# Altium PCB VISUR_SB.PcbDoc
Units mm, origin at the board's own origin, x right, y up, seen from the top; angles counter-clockwise.
Board outline 45 x 60.5 mm, 2 copper layers (Top Layer, Bottom Layer), stack 1.486 mm thick; 1 components, 0 nets, 22 pads, 0 vias.
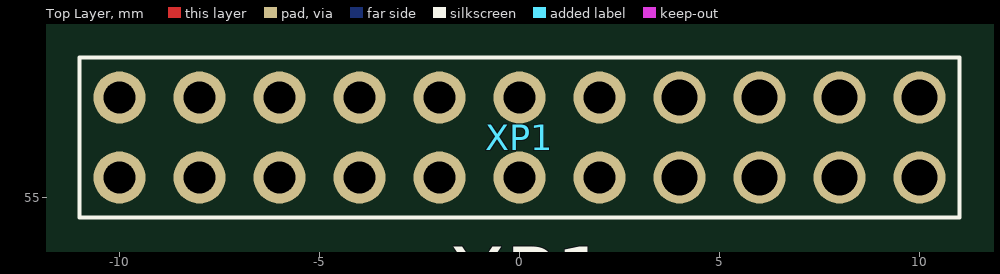
[diagram p0: Top Layer view]
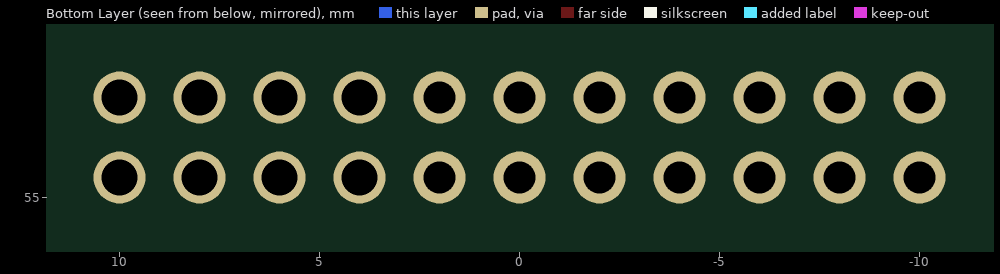
[diagram p1: Bottom Layer view, seen from below]

## Layer stack, top to bottom
Top Solder: solder mask 0.0102, Solder Resist, Dk 3.5
Top Layer: signal copper 0.018
Dielectric 2: prepreg 0.125, PP-006, Dk 4.1
Dielectric 1: dielectric 1.2, FR-4, Dk 4.8
Dielectric 3: prepreg 0.125, PP-006, Dk 4.1
Bottom Layer: signal copper 0.018
Bottom Solder: solder mask 0.0102, Solder Resist, Dk 3.5

## Board outline
-12.475,0 -11.075,0 -11.075,5.488 cw(c-10.525,5.488) -9.975,5.488 -9.975,0 9.975,0 9.975,5.488 cw(c10.525,5.488) 11.075,5.488 11.075,0 12.475,0 ccw(c10.564,1.87) 13.232,2.044 12.5,8.3 12.5,12.95 cw(c13.05,12.95) 13.05,13.5 22.5,13.5 22.5,60.5 -22.5,60.5 -22.5,13.5 -13.05,13.5 cw(c-13.05,12.95) -12.5,12.95 -12.5,8.3 -13.232,2.044 ccw(c-10.564,1.87)

## Design rules (kind name [scope] priority, off if disabled: settings)
Clearance [All] p1: gap=0.254 ignorepadtopadclearanceinfootprint=FALSE except(0: Arc-Hole Track-Hole SMDPad-Hole THPad-Hole Via-Hole Fill-Hole Poly-Hole Region-Hole Text-Hole)
PolygonConnect [All] p1: connectstyle=Relief reliefconductorwidth=0.254 reliefentries=4 polygonreliefangle="90 Angle" airgapwidth=0.254
RoutingVias [All] p1: holewidth=0.711 width=1.27 viastyle="Through Hole" minholewidth=0.711 minwidth=1.27 maxholewidth=0.711 maxwidth=1.27
SolderMaskExpansion [All] p1: expansion=0.102 istentingtop=FALSE
Width [All] p1: maxlimit=0.254 minlimit=0.254 preferedwidth=0.254
30 further rules are at their usual default settings.

## Components (designator, comment, footprint, x,y, rotation, side; value= is the part's Value field where it differs from the comment)
XP1 "PLD2-22-R(Male)" "CON: PLD2-22-R(Male)" -10,55.5 r0 top

## Footprints (in the part's own frame and the unit in brackets; to place one, negate y for a bottom-side part, rotate by r counter-clockwise, add the part's x,y. Pads: shape width x height; smd on the part's side, far side on the other; paste and mask are expansions set on the pad)
"CON: PLD2-22-R(Male)" [mm]
  round 1.3 hole 0.8: 1(0,0) 2(0,2) 3(2,0) 4(2,2) 5(4,0) 6(4,2) 7(6,0) 8(6,2) 9(8,0) 10(8,2) 11(10,0) 12(10,2) 13(12,0) 14(12,2)
  round 1.3 hole 0.9: 15(14,0) 16(14,2) 17(16,0) 18(16,2) 19(18,0) 20(18,2) 21(20,0) 22(20,2)
  silkscreen extent -1,-1 21,3, body extent -1,-0.25 21,9, height 4.05

## Part data
XP1: ComponentLink1Description=Datasheet, ComponentLink1URL=https://www.compel.ru/item-pdf/1e1366ded138976aeb89dd182fa987b9/ps/kls~kls1-207b.pdf

## Nets (pads, with @x,y where several pads share a name; then routed paths per layer and width w, separated by ;. In a path a pad name is that pad's centre, name@x,y a point inside that pad or via, vN(x,y) a via of type N, cw(c..) or ccw(c..) an arc to the next point about the centre after c; other vN are vias at no path point)
pads on no net: XP1.1 XP1.2 XP1.3 XP1.4 XP1.5 XP1.6 XP1.7 XP1.8 XP1.9 XP1.10 XP1.11 XP1.12 XP1.13 XP1.14 XP1.15 XP1.16 XP1.17 XP1.18 XP1.19 XP1.20 XP1.21 XP1.22

## Silkscreen, mask and mechanical layers (free items; w line width, h text height)
Board:
  lines w0.1: -22.5,13.5 -13.5,13.5 -13.05,13.5 cw(c-13.05,12.95) -12.5,12.95 -12.5,12.5 -12.5,8.3 -13.232,2.044 ccw(c-10.564,1.87) -12.475,0 -11.075,0 -11.075,5.488 cw(c-10.525,5.488) -9.975,5.488 -9.975,0 9.975,0 9.975,5.488 cw(c10.525,5.488) 11.075,5.488 11.075,0 12.475,0 ccw(c10.564,1.87) 13.232,2.044 12.5,8.3 12.5,12.5 12.5,12.95 cw(c13.05,12.95) 13.05,13.5 13.5,13.5 22.5,13.5 22.5,60.5 -22.5,60.5 -22.5,13.5